# Altium PCB CIR_LED_SEQ.PcbDoc
Units mil, origin at the board's own origin, x right, y up, seen from the top; angles counter-clockwise.
Board outline 1732.28 x 1732.28 mil, 2 copper layers (Top Layer, Bottom Layer 1); 28 components, 26 nets, 77 pads, 20 vias.
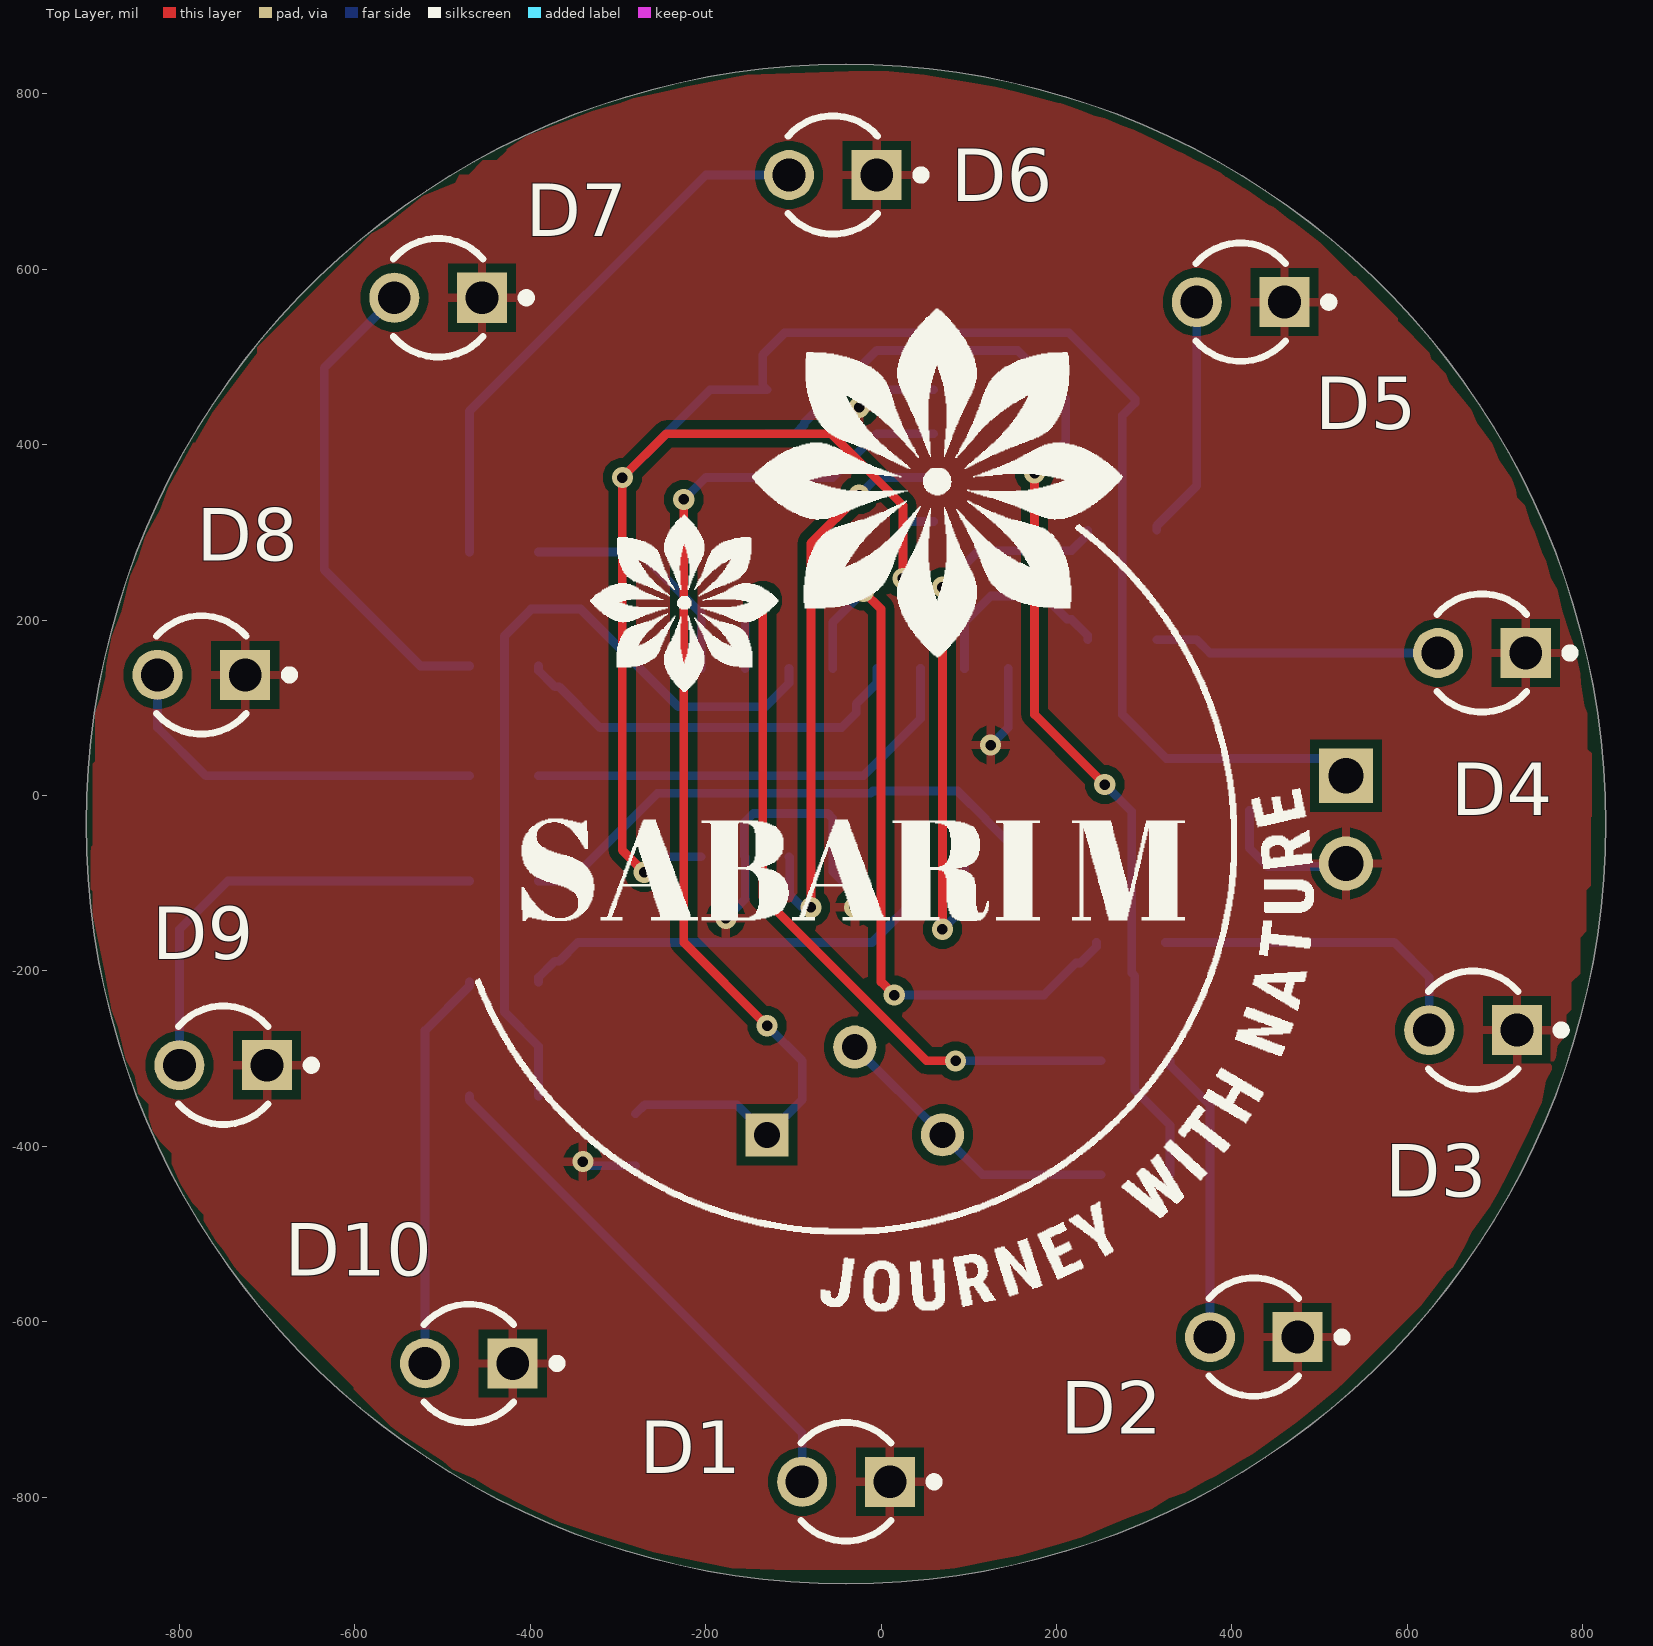
[diagram p0: Top Layer view]
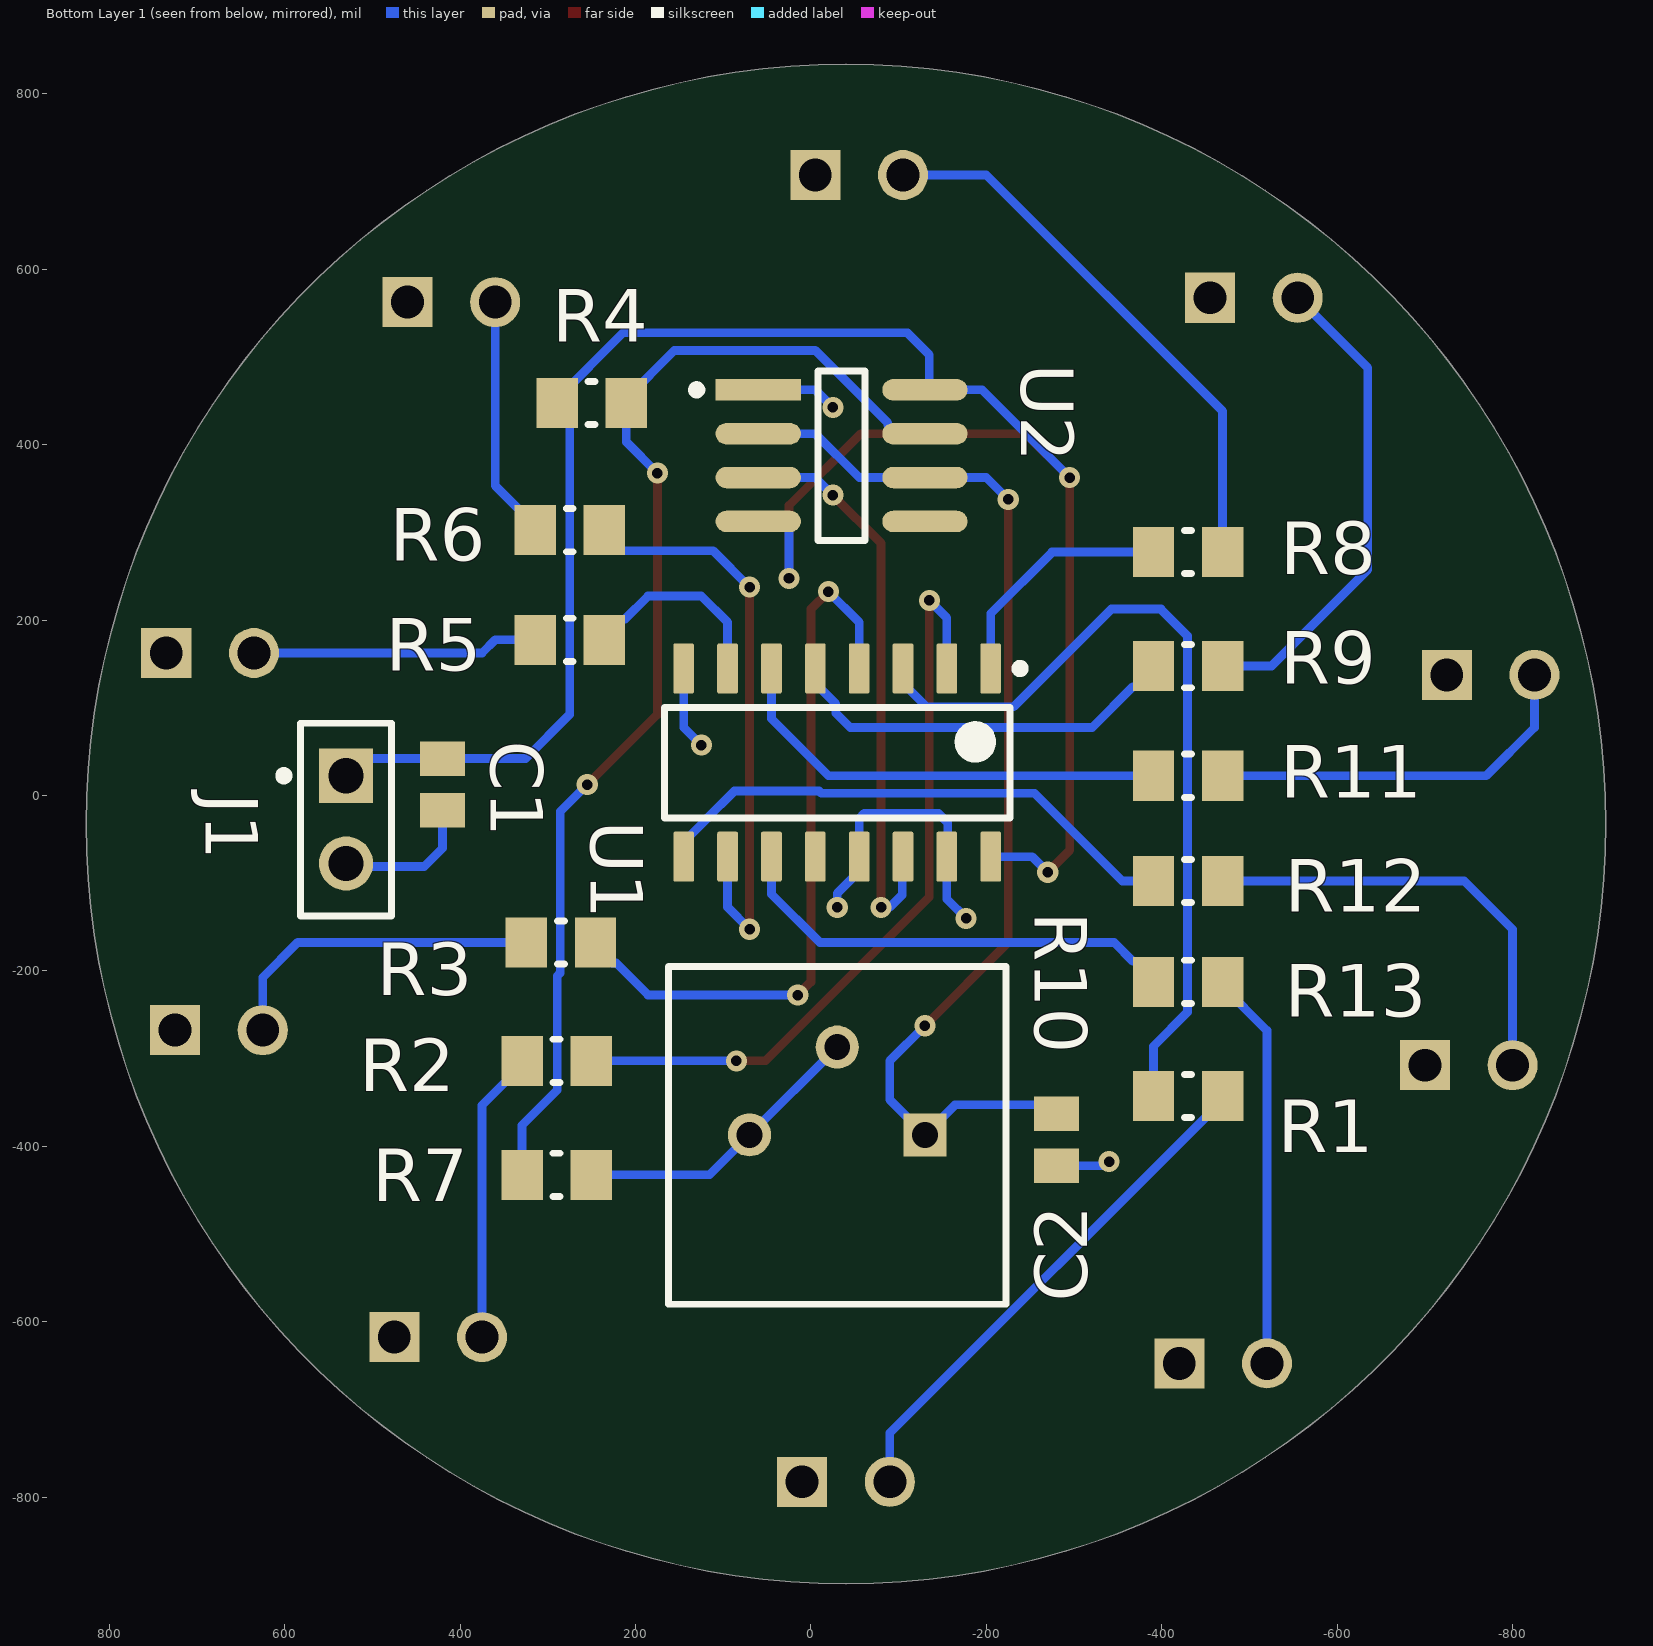
[diagram p1: Bottom Layer 1 view, seen from below]
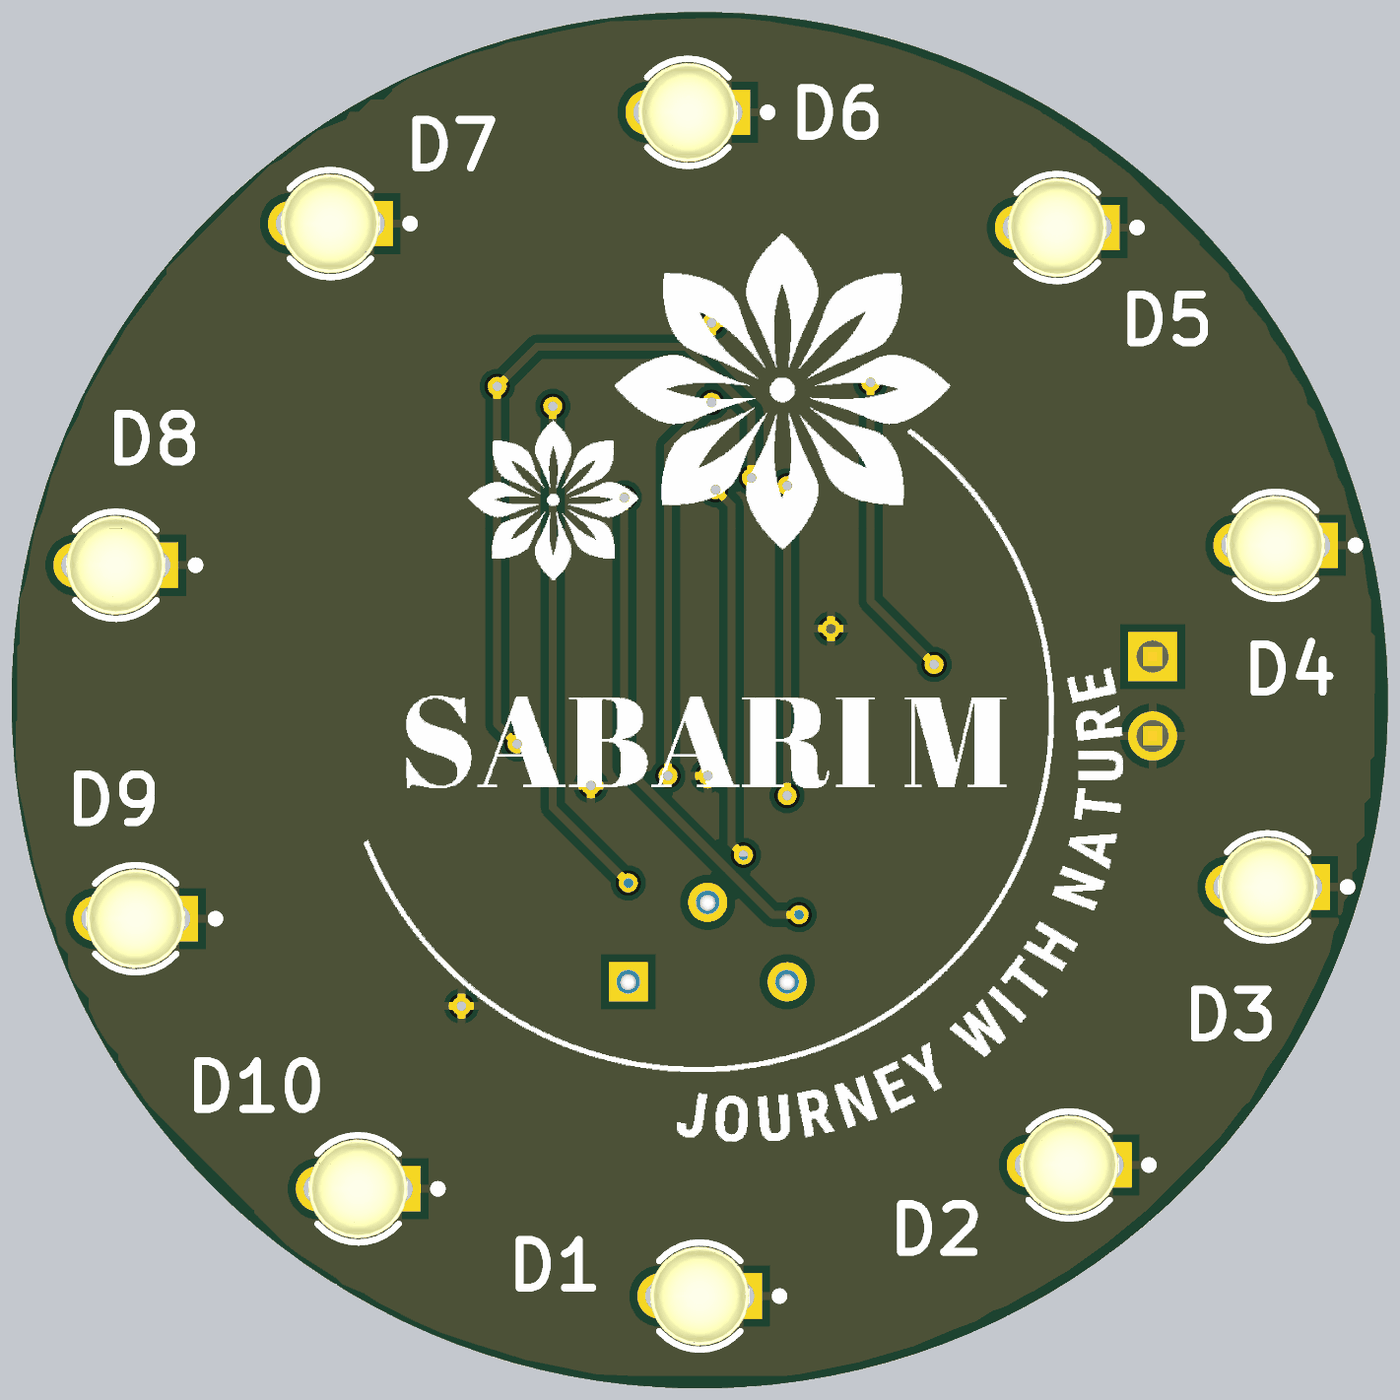
[diagram p2: 3D render of the assembled board from above, using the file's embedded part models]
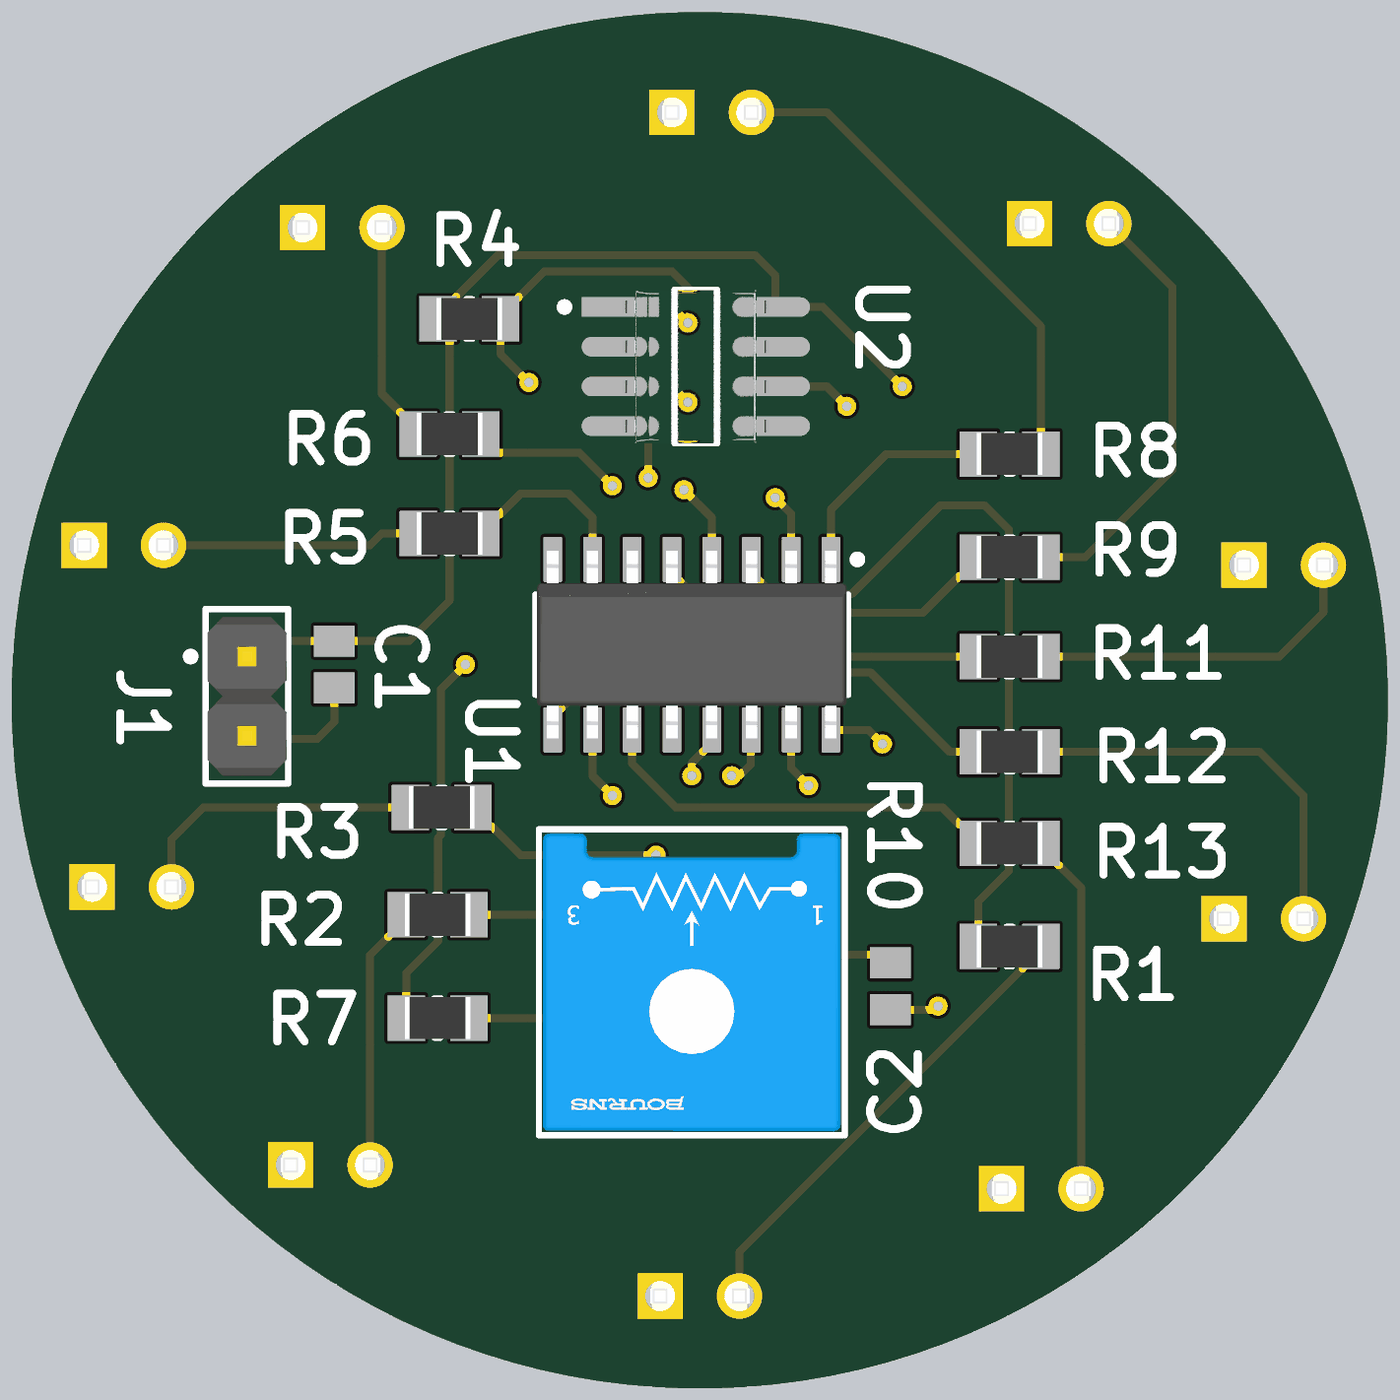
[diagram p3: 3D render of the assembled board from below, using the file's embedded part models]

## Layer stack, top to bottom
Top Solder: solder mask 0.4, Solder Resist, Dk 3.5
Top Layer: signal copper 1.4
Dielectric 1: dielectric 12.6, FR-4, Dk 4.8
Bottom Layer 1: signal copper 1.4
Bottom Solder: solder mask 0.4, Solder Resist, Dk 3.5

## Board outline
-40,-898.64 cw(c-40,-32.5) -906.14,-32.5 cw(c-40,-32.5) -40,833.64 cw(c-40,-32.5) 826.14,-32.5 cw(c-40,-32.5)

## Design rules (kind name [scope] priority, off if disabled: settings)
Clearance [All] p1: gap=10 ignorepadtopadclearanceinfootprint=FALSE
PolygonConnect [All] p1: connectstyle=Relief reliefconductorwidth=10 reliefentries=4 polygonreliefangle="90 Angle" airgapwidth=10
RoutingVias [All] p1: holewidth=28 width=50 viastyle="Through Hole" minholewidth=28 minwidth=50 maxholewidth=28 maxwidth=50
SilkToSolderMaskClearance [IsPad] p1: minsilkscreentomaskgap=5 clearancetoexposedcopper=TRUE
SolderMaskExpansion [All] p1: expansion=4 istentingtop=FALSE
SupplyNets "Schematic Supply Nets_1" [InNet('GND')] p1: voltage=0.000
SupplyNets "Schematic Supply Nets" [InNet('VCC')] p2: voltage=0.000
Width [All] p1: maxlimit=10 minlimit=10 preferedwidth=10
29 further rules are at their usual default settings.

## Components (designator, comment, footprint, x,y, rotation, side; value= is the part's Value field where it differs from the comment)
C1 "1uf" CAPC2013X135X45LL10T25 420,12.5 r90 bottom
C2 "GRM21BR71H105KA12L" CAPC2013X135X45LL10T25 -280,-392.5 r90 bottom
D1 "HLMP-1719" FP-HLMP-1719-MFG -40,-782.5 r180 top
D2 "HLMP-1719" FP-HLMP-1719-MFG 425,-617.5 r180 top
D3 "HLMP-1719" FP-HLMP-1719-MFG 675,-267.5 r180 top
D4 "HLMP-1719" FP-HLMP-1719-MFG 685,162.5 r180 top
D5 "HLMP-1719" FP-HLMP-1719-MFG 410,562.5 r180 top
D6 "HLMP-1719" FP-HLMP-1719-MFG -55,707.5 r180 top
D7 "HLMP-1719" FP-HLMP-1719-MFG -505,567.5 r180 top
D8 "HLMP-1719" FP-HLMP-1719-MFG -775,137.5 r180 top
D9 "HLMP-1719" FP-HLMP-1719-MFG -750,-307.5 r180 top
D10 "HLMP-1719" FP-HLMP-1719-MFG -470,-647.5 r180 top
J1 "M20-9990245" FP-M20-9990245-MFG 530,-27.5 r270 bottom
R1 "RC0805FR-071KL" RESC2013X60X35ML10T20 -430,-342.5 r180 bottom value=1KOhm
R2 "RC0805FR-071KL" RESC2013X60X35ML10T20 290,-302.5 r0 bottom value=1KOhm
R3 "RC0805FR-071KL" RESC2013X60X35ML10T20 285,-167.5 r0 bottom value=1KOhm
R4 "2k2" RESC2013X60X35ML10T20 250,447.5 r0 bottom value=1KOhm
R5 "RC0805FR-071KL" RESC2013X60X35ML10T20 275,177.5 r0 bottom value=1KOhm
R6 "RC0805FR-071KL" RESC2013X60X35ML10T20 275,302.5 r0 bottom value=1KOhm
R7 "10k" RESC2013X60X35ML10T20 290,-432.5 r0 bottom value=1KOhm
R8 "RC0805FR-071KL" RESC2013X60X35ML10T20 -430,277.5 r180 bottom value=1KOhm
R9 "RC0805FR-071KL" RESC2013X60X35ML10T20 -430,147.5 r180 bottom value=1KOhm
R10 "50k" FP-3386P-MFG -30,-387.5 r0 bottom value=100kR
R11 "RC0805FR-071KL" RESC2013X60X35ML10T20 -430,22.5 r180 bottom value=1KOhm
R12 "RC0805FR-071KL" RESC2013X60X35ML10T20 -430,-97.5 r180 bottom value=1KOhm
R13 "RC0805FR-071KL" RESC2013X60X35ML10T20 -430,-212.5 r180 bottom value=1KOhm
U1 "CD4017BM" D0016A_N -30,37.5 r270 bottom
U2 "NE555DR" FP-D0008A-IPC_A -35,387.5 r180 bottom

## Footprints (in the part's own frame and the unit in brackets; to place one, negate y for a bottom-side part, rotate by r counter-clockwise, add the part's x,y. Pads: shape width x height; smd on the part's side, far side on the other; paste and mask are expansions set on the pad)
CAPC2013X135X45LL10T25 [mm] "Chip Capacitor, 2-Leads, Body 2.00x1.25mm, IPC High Density"
  rect 1x1.3 smd: 1(-0.75,0) 2(0.75,0)
  body extent -1.05,-0.67 1.05,0.68, height 1.35
D0016A_N [mm] "SOIC, 16-Leads, Body 10x4mm, Pitch 1.27mm, IPC Medium Density"
  rrect17% 1.45x0.6 smd: 1(-2.725,4.445) 2(-2.725,3.175) 3(-2.725,1.905) 4(-2.725,0.635) 5(-2.725,-0.635) 6(-2.725,-1.905) 7(-2.725,-3.175) 8(-2.725,-4.445) 9(2.725,-4.445) 10(2.725,-3.175) 11(2.725,-1.905) 12(2.725,-0.635) 13(2.725,0.635) 14(2.725,1.905) 15(2.725,3.175) 16(2.725,4.445)
  silkscreen extent -2.85,-5 1.6,5.42, body extent -3,-4.95 3,4.95, height 1.59
FP-3386P-MFG [mm]
  rect 1.25x1.25 hole 0.75 paste-2539.97 mask+0: 1(-2.54,-0.015)
  round 1.25 hole 0.75 paste-2539.97 mask+0: 2(0,-2.555) 3(2.54,-0.015)
  silkscreen extent -4.89,-4.89 4.89,4.89, body extent -4.76,-4.76 4.76,4.76, height 5.08
FP-D0008A-IPC_A [mil]
  rect 97.21x24.49 smd paste+0 mask+0: 1(-95.02,75)
  rrect100% 97.21x24.49 smd paste+0 mask+0: 2(-95.02,25) 3(-95.02,-25) 4(-95.02,-75) 5(95.02,-75) 6(95.02,-25) 7(95.02,25) 8(95.02,75)
  silkscreen extent -170,-97 27,97, body extent -118,-96 118,96, height 69
FP-HLMP-1719-MFG [mm]
  rect 1.45x1.45 hole 0.95 paste-2539.97 mask+0: 1(-1.27,0)
  round 1.45 hole 0.95 paste-2539.97 mask+0: 2(1.27,0)
  silkscreen extent -2.68,-1.71 1.3,1.71, body extent -2.22,-2.22 2.22,2.22, height 0.25
FP-M20-9990245-MFG [mm]
  rect 1.57x1.57 hole 1.02 paste-2539.97 mask+0: 1(-1.27,0)
  round 1.57 hole 1.02 paste-2539.97 mask+0: 2(1.27,0)
  silkscreen extent -2.79,-1.92 2.79,1.32, body extent -2.54,-1.27 2.54,1.27, height 11.53
RESC2013X60X35ML10T20 [mm] "Chip Resistor, 2-Leads, Body 2.1x1.35mm, IPC Low Density"
  rect 1.2x1.45 smd: 1(-1,0) 2(1,0)
  silkscreen extent -0.1,-0.63 0.1,0.63, body extent -1.05,-0.68 1.05,0.67, height 0.6

## Part data
C1: library part CMP-1036-04761-2, Manufacturer=Murata, Part Number=GRM21BR71H105KA12L
C2: library part CMP-1036-04761-2, Manufacturer=Murata, Part Number=GRM21BR71H105KA12L
D1 D2 D3 D4 D5 D6 D7 D8 D9 D10: library part CMP-2000-06410-2, "LED YELLOW DIFFUSED T-1 T/H", Colour=Yellow, Forward Current=2mA, Forward Voltage=1.8V, Manufacturer=Broadcom, Package=0, Power Dissipation=17.5mW, Reverse Voltage=5V, Temperature="-40°C to +100°C", Temperature Range High=+100°C, Temperature Range Low=-40°C, Automotive=No, Category=Diode, ComponentLink2Description=Datasheet, ComponentLink2URL=https://docs.broadcom.com/docs/AV02-1557EN, Device Class L1=Optoelectronics, Device Class L2=LEDs, Device Class L3=unset, Digikey Description="LED YELLOW DIFFUSED T-1 T/H", Lead Free=Yes, Led Orientation=Straight, Luminous Intensity=2.1mcd, Manufacturer Part Number=HLMP-1719, Mouser Description="Standard LEDs - Through Hole Yellow Diffused 585nm 2.1mcd", Octopart=https://octopart.com/hlmp-1719-broadcom-71130405, RoHS=TRUE, Viewing Angle=50°, Wavelength=585nm
J1: library part CMP-15831-000105-1, "CONN HEADER VERT 2POS 2.54MM", Case/Package=SIL, Color=Black, Contact Resistance=25mR, Current=3A, Flammability Rating="UL94 V-0", Insulation Resistance=10GR, Max Operating Temperature=105°C, Min Operating Temperature=-40°C, Package Quantity=1000, Voltage=50V, Voltage Rating (AC)=750V, Connector Type="Male Pin", Contact Finish - Mating=GOLD, Contact Material=Brass, Contact Mating Length=0.24inch, Contact Plating=Gold, Contact Shape=Square, Contact Type="Male Pin", Current Rating=3A, Depth=2.54mm, Fastening Type=Pull, Gender=Male, Height=0.12inch, Housing Color=Black, Housing Material=Nylon, Insulation Color=Black, Insulation Material=Nylon, Lead Pitch=2.54mm, Length=5.08mm, Mated Stacking Heights=16.54mm, Mating Cycles=300, Max Current Rating=3A, Mount="Through Hole", Number of Contacts=2, Number of Poles=2, Number of Positions=2, Number of Rows=1, Orientation=Straight, Packaging=Bulk, Pitch=2.54mm, Radiation Hardening=No, Reach SVHC Compliant=Yes, Series=M20, Termination=Solder, Weight=0.25lb, Width=0.25inch, Working Voltage=750V
R1 R2 R3 R4 R5 R6 R7 R8 R9 R11 R12 R13: library part CMP-2100-03671-1, "Chip Resistor, 1 KOhm, +/- 1%, 125 mW, -55 to 155 degC, 0805 (2012 Metric), RoHS, Tape and Reel", Case Code (Imperial)=0805, Case Code (Metric)=2012, Manufacturer=Yageo, Max Operating Temperature=155degC, Max Power Dissipation=125mW, Min Operating Temperature=-55degC, Package Description="2-Pin Surface Mounted Device, Body 2 x 1.25 mm", Package Quantity=1, Resistance=1KOhm, Temperature Coefficient=100ppm/degreesC, Tolerance=1%, Voltage Rating=150V, Case/Package=0805, Composition=ThickFilm, Datasheet URL=http://www.yageo.com/NewPortal/yageodocoutput?fileName=/pdf/R-Chip/PYu-RC_Group_51_RoHS_L_5.pdf, Datasheet Version="Rev. 5, 10/2016", Depth=1.25mm, Height=0.024inch, Lead Free=LeadFree, Length=0.079inch, Manufacturer URL=http://www.yageo.com/, Military Standard=Not, Number of Pins=2, Number of Terminations=2, Package Reference=0805, Packaging=TapeandReel, Power Rating=125mW, REACH SVHC=Unknown, RoHSCompliant=true, Termination=SMD/SMT, Voltage Rating (DC)=150V, Width=0.049inch
R10: library part CMP-2000-05592-8, "TRIMMER 100K OHM 0.5W PC PIN TOP", Color=Blue, Manufacturer Series=3386, Max Operating Temperature=125°C, Max Power Dissipation=500mW, Min Operating Temperature=-55°C, Package Quantity=100, Resistance=100kR, Resistance Law=Linear, Resistance Tolerance=10%, Resistor Type=Cermet, Temperature Coefficient=100ppm/°C, Voltage Rating=300V, Actuator Orientation=Vertical, Actuator Type=SCREW, Contact Plating=Tin, Depth=9.53mm, Height=4.83mm, Lead Free="Contains Lead", Length=9.53mm, Military Standard=Not, Mount="Through Hole", Number of Pins=3, Number of Terminals/Pins=3, Number of Turns=1, Packaging=Rail/Tube, Power Rating=500mW, Radiation Hardening=No, Reach SVHC Compliant=Yes, RoHS Compliant=Yes, Series="Trimpot® 3386 - Sealed", Taper=Linear, Technology=CERMET, Terminal Finish=Tin, Termination=Pin, Tolerance=10%, Type=Potentiometer, Weight=0.03oz, Width=9.53mm
U1: library part CMP-1623-00071-2, "CMOS Decade Counter with 10 Decoded Outputs, D0016A, TUBE", F @ Nom Voltage(Max)(Mhz)=8, Generic Part Number=CD4017B, ICC @ Nom Voltage(Max)(mA)=0.03, Manufacturer="Texas Instruments", Operating Temperature Range(C)="-55 to 125", Rating=Military, tpd @ Nom Voltage(Max)(ns)=270, Voltage(Nom)(V)=10, Bits(#)=10, Code_JEDEC="MS-012 variation AC", DatasheetVersion=SCHS027C, Function=Counter, Input Type=CMOS, Inputs=1, Output Drive (IOL/IOH)(Max)(mA)=1.5/-1.5, Output Type=CMOS, PackageReference=D0016A, Schmitt Trigger=No, Technology Family=CD4000, Type=Decade, VCC(Max)(V)=18, VCC(Min)(V)=3
U2: library part CMP-1685-00007-2, "IC OSC SGL TIMER 100KHZ 8-SOIC", Case/Package=SOIC, Frequency=100kHz, High Level Output Current=-200mA, Low Level Output Current=200mA, Max Operating Temperature=70°C, Max Supply Voltage=16V, Min Operating Temperature=0°C, Min Supply Voltage=4.5V, Operating Supply Current=10mA, Package Quantity=2500, Quiescent Current=15mA, Contact Plating=Gold, Height=1.58mm, Lead Free="Lead Free", Length=4.9mm, Mount="Surface Mount", Number of Pins=8, Number of Timers/Counters=1, Packaging="Tape and Reel", Radiation Hardening=No, REACH SVHC="No SVHC", Weight=0.002561oz, Width=3.91mm

## Via types
v1: diameter 24, hole 12, Top Layer to Bottom Layer 1, 20 vias

## Nets (pads, with @x,y where several pads share a name; then routed paths per layer and width w, separated by ;. In a path a pad name is that pad's centre, name@x,y a point inside that pad or via, vN(x,y) a via of type N, cw(c..) or ccw(c..) an arc to the next point about the centre after c; other vN are vias at no path point)
GND: C1.1 C2.1 D1.1 D2.1 D3.1 D4.1 D5.1 D6.1 D7.1 D8.1 D9.1 D10.1 J1.2 U1.8 U1.13 U1.15 U2.1 | length 751.8
  Bottom Layer 1 w10: v1(-340,-417.5) -335.47,-422.03 C2.1 ; v1(-177,-140) -155,-118 U1.15 -156,-68.78 -156,-31 -145.38,-20.38 -60.86,-20.38 -55,-26.24 U1.13 -55,-86.52 -30,-111.52 v1(-30,-127.5) ; v1(-25,442.5) -5,462.5 U2.1 ; v1(125,57.5) 145,77.5 U1.8 ; C1.1 420,-60 441,-81 526.5,-81 J1.2
NetC2_2: C2.2 R10.1 U2.2 U2.6 | length 1281.6
  Top Layer w10: v1(-225,337.5) -225,-167.5 v1(-130,-262.5)
  Bottom Layer 1 w10: C2.2 -269.53,-352.5 -164.41,-352.5 R10.1 -90,-346.91 -90,-302.5 v1(-130,-262.5) ; v1(-225,337.5) -200,362.5 U2.6 -55,362.5 -5,412.5 U2.2
NetD1_2: D1.2 R1.2 | length 597.1
  Bottom Layer 1 w10: R1.2 -469.37,-347.42 -90,-726.79 D1.2
NetD2_2: D2.2 R2.2 | length 333.9
  Bottom Layer 1 w10: R2.2 329.37,-307.42 375,-353.05 D2.2
NetD3_2: D3.2 R3.2 | length 377.2
  Bottom Layer 1 w10: R3.2 585,-167.5 625,-207.5 D3.2
NetD4_2: D4.2 R5.2 | length 326.8
  Bottom Layer 1 w10: R5.2 360,177.5 375,162.5 D4.2
NetD5_2: D5.2 R6.2 | length 278.9
  Bottom Layer 1 w10: R6.2 314.37,307.42 360,353.05 D5.2
NetD6_2: D6.2 R8.2 | length 636.6
  Bottom Layer 1 w10: R8.2 -469.37,438.13 -200,707.5 D6.2
NetD7_2: D7.2 R9.2 | length 554.3
  Bottom Layer 1 w10: D7.2 -635,487.5 -635,257.5 -525,147.5 R9.2
NetD8_2: D8.2 R11.2 | length 438.4
  Bottom Layer 1 w10: D8.2 -825,77.5 -770,22.5 R11.2
NetD9_2: D9.2 R12.2 | length 508.4
  Bottom Layer 1 w10: D9.2 -800,-152.5 -745,-97.5 R12.2
NetD10_2: D10.2 R13.2 | length 456
  Bottom Layer 1 w10: D10.2 -520,-268.05 -469.37,-217.42 R13.2
NetR1_1: R1.1 U1.3 | length 951.5
  Bottom Layer 1 w10: R1.1 -390.63,-285.88 -429.25,-247.26 -429.25,182.26 -399.01,212.5 -342.5,212.5 -231.24,101.24 -131.81,101.24 -105,128.05 U1.3
NetR2_1: R2.1 U1.2 | length 887.2
  Top Layer w10: v1(-135,222.5) -135,-115.68 51.82,-302.5 v1(85,-302.5)
  Bottom Layer 1 w10: U1.2 -155,202.5 v1(-135,222.5) ; v1(85,-302.5) R2.1
NetR3_1: R3.1 U1.4 | length 835.1
  Top Layer w10: v1(-20,232.5) 0,212.5 0,-212.5 v1(15,-227.5)
  Bottom Layer 1 w10: U1.4 -55,197.5 v1(-20,232.5) ; v1(15,-227.5) 185.63,-227.5 222.09,-191.04 227.01,-191.04 245.63,-172.42 R3.1
NetR4_1: R4.1 R7.2 U2.7 | length 1367.9
  Top Layer w10: v1(175,367.5) 175,92.5 v1(255,12.5)
  Bottom Layer 1 w10: U2.7 -97.59,412.5 -87.57,422.52 -87.57,424.93 -5,507.5 155.55,507.5 210.63,452.42 R4.1 210.63,403.13 v1(175,367.5) ; v1(255,12.5) 285.75,-18.25 285.75,-202.26 289.25,-205.76 289.25,-335.76 329.37,-375.88 R7.2
NetR5_1: R5.1 U1.7 | length 229.4
  Bottom Layer 1 w10: U1.7 95,197.5 125,227.5 185.63,227.5 212.09,201.04 217.01,201.04 235.63,182.42 R5.1
NetR6_1: R6.1 U1.10 | length 678.5
  Top Layer w10: v1(70,-152.5) v1(70,237.5)
  Bottom Layer 1 w10: v1(70,-152.5) 95,-127.5 U1.10 ; v1(70,237.5) 111.46,278.96 217.01,278.96 235.63,297.58 R6.1
NetR7_1: R7.1 R10.2 R10.3 | length 340.9
  Bottom Layer 1 w10: R10.2 R10.3 115.59,-432.5 R7.1
NetR8_1: R8.1 U1.1 | length 277.3
  Bottom Layer 1 w10: R8.1 -275,277.5 -205,207.5 U1.1
NetR9_1: R9.1 U1.5 | length 461.4
  Bottom Layer 1 w10: R9.1 -390.63,142.58 -372.01,123.96 -367.09,123.96 -320.63,77.5 -45,77.5 -28.41,94.09 -28.41,104.65 -5,128.05 U1.5
NetR11_1: R11.1 U1.6 | length 519.8
  Bottom Layer 1 w10: R11.1 -20,22.5 45,87.5 U1.6
NetR12_1: R12.1 U1.9 | length 619.2
  Bottom Layer 1 w10: R12.1 -355,-97.5 -255,2.5 -11.72,2.5 -9.22,5 87.5,5 119.09,-26.59 119.09,-27.15 145,-53.05 U1.9
NetR13_1: R13.1 U1.11 | length 522.7
  Bottom Layer 1 w10: R13.1 -390.63,-207.58 -372.01,-188.96 -367.09,-188.96 -345.63,-167.5 -10,-167.5 45,-112.5 U1.11
NetU1_14: U1.14 U2.3 | length 660
  Top Layer w10: v1(-80,-127.5) -80,287.5 v1(-25,342.5)
  Bottom Layer 1 w10: U1.14 -104.17,-70.61 -104.17,-113.33 -90,-127.5 v1(-80,-127.5) ; v1(-25,342.5) -5,362.5 U2.3
VCC: C1.2 J1.1 R4.2 U1.16 U2.4 U2.8 | length 2450.7
  Top Layer w10: v1(-270,-87.5) -295,-62.5 v1(-295,362.5) -245,412.5 -56.82,412.5 25,330.68 v1(25,247.5)
  Bottom Layer 1 w10: v1(-295,362.5) -195,462.5 U2.8 -135,467.48 -135,502.5 -110,527.5 214.29,527.5 289.37,452.42 R4.2 275,433.13 275,92.5 325.47,42.03 C1.2 510.47,42.03 J1.1 ; v1(-270,-87.5) -252.28,-69.78 U1.16 ; v1(25,247.5) 25,305.8 31.7,312.5 U2.4
pads on no net: U1.12 U2.5

## Polygon pours and split planes (outlines as drawn)
GND on Top Layer "GND_L01_P000" (solid, pour order 0): 203 vertices, not listed, extent -901,-883 810,826

## Other copper
Top Layer:
  text "866.142mil" at -2375,4331.5 h60

## Silkscreen, mask and mechanical layers (free items; w line width, h text height)
Top Overlay:
  drawing of 58 lines, arcs and shapes, not listed